# Altium PCB WORKS_PCB.PcbDoc
Units mil, origin at the board's own origin, x right, y up, seen from the top; angles counter-clockwise.
Board outline 2500.62 x 3300.62 mil, 2 copper layers (Top Layer, Bottom Layer); 36 components, 43 nets, 166 pads, 4 vias.
Unrouted connection lines stored in the file: 69.
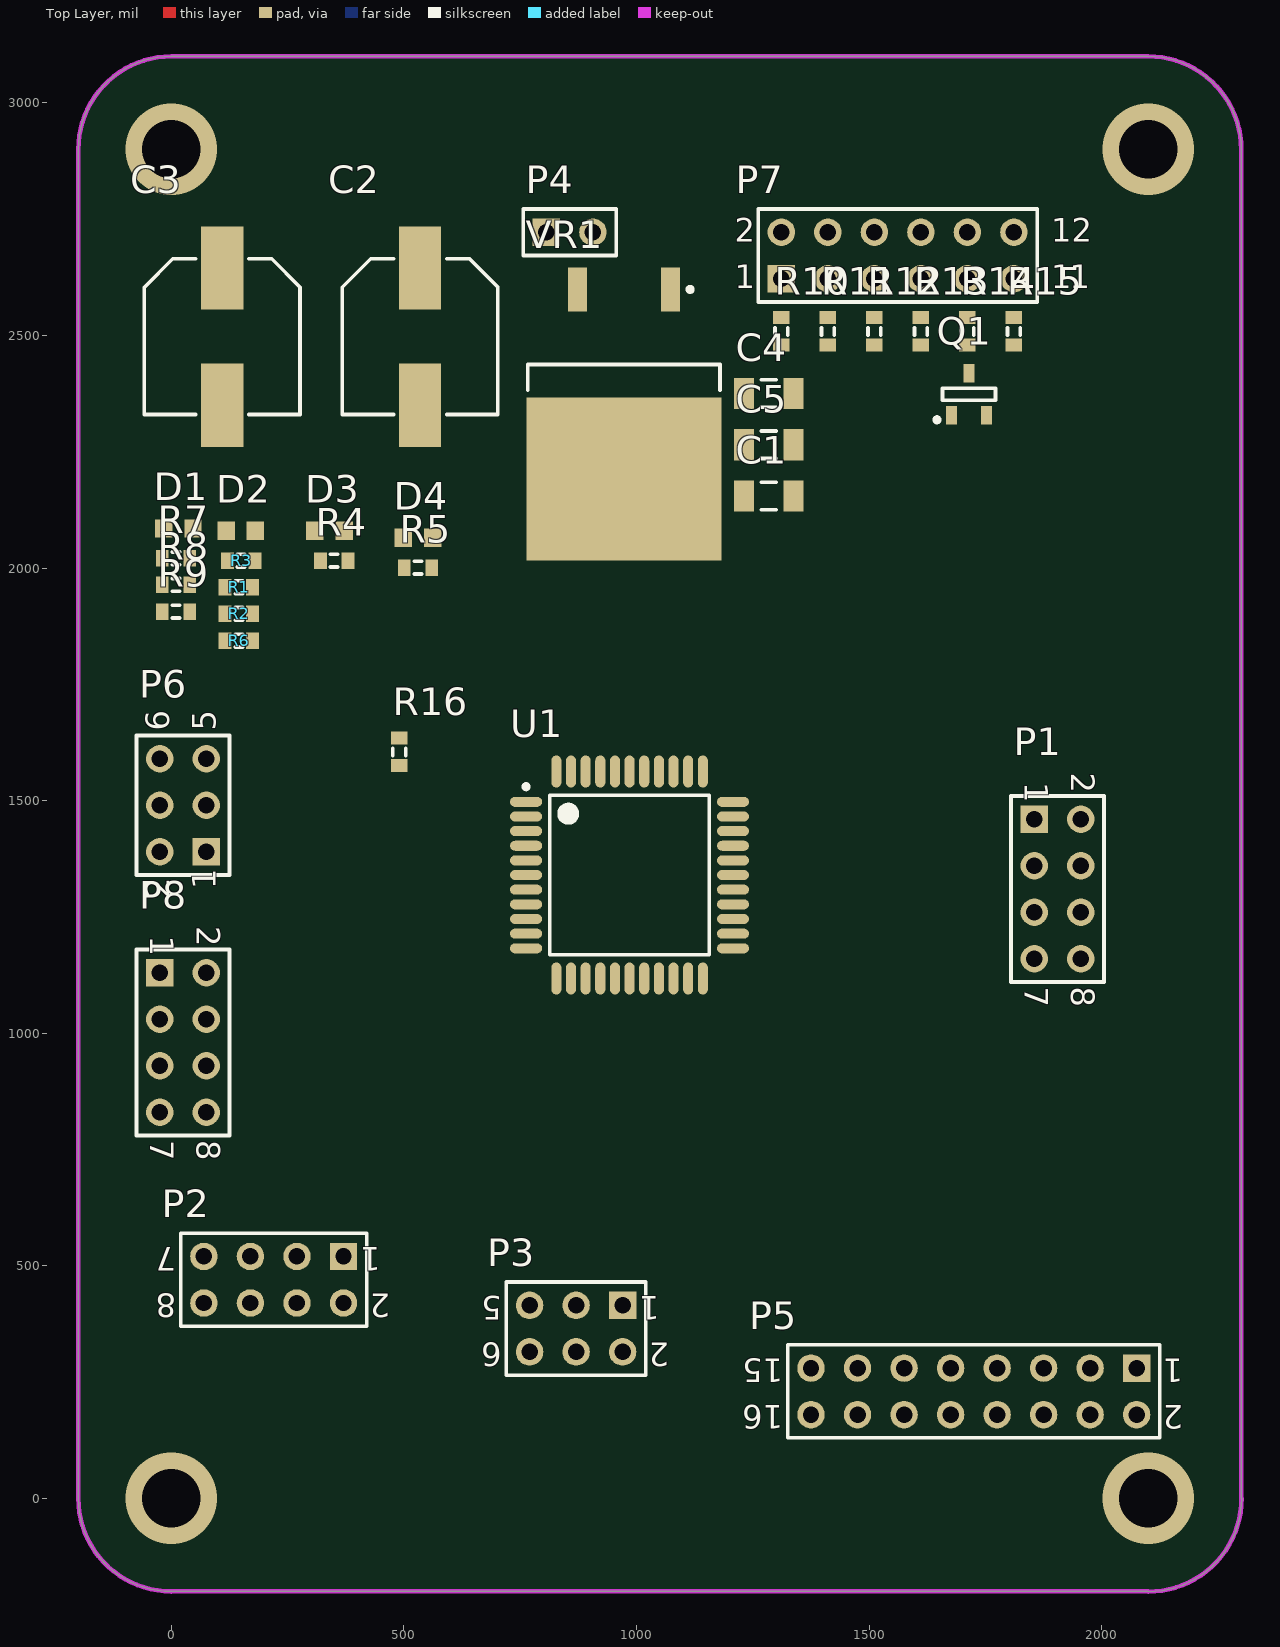
[diagram p0: Top Layer view]
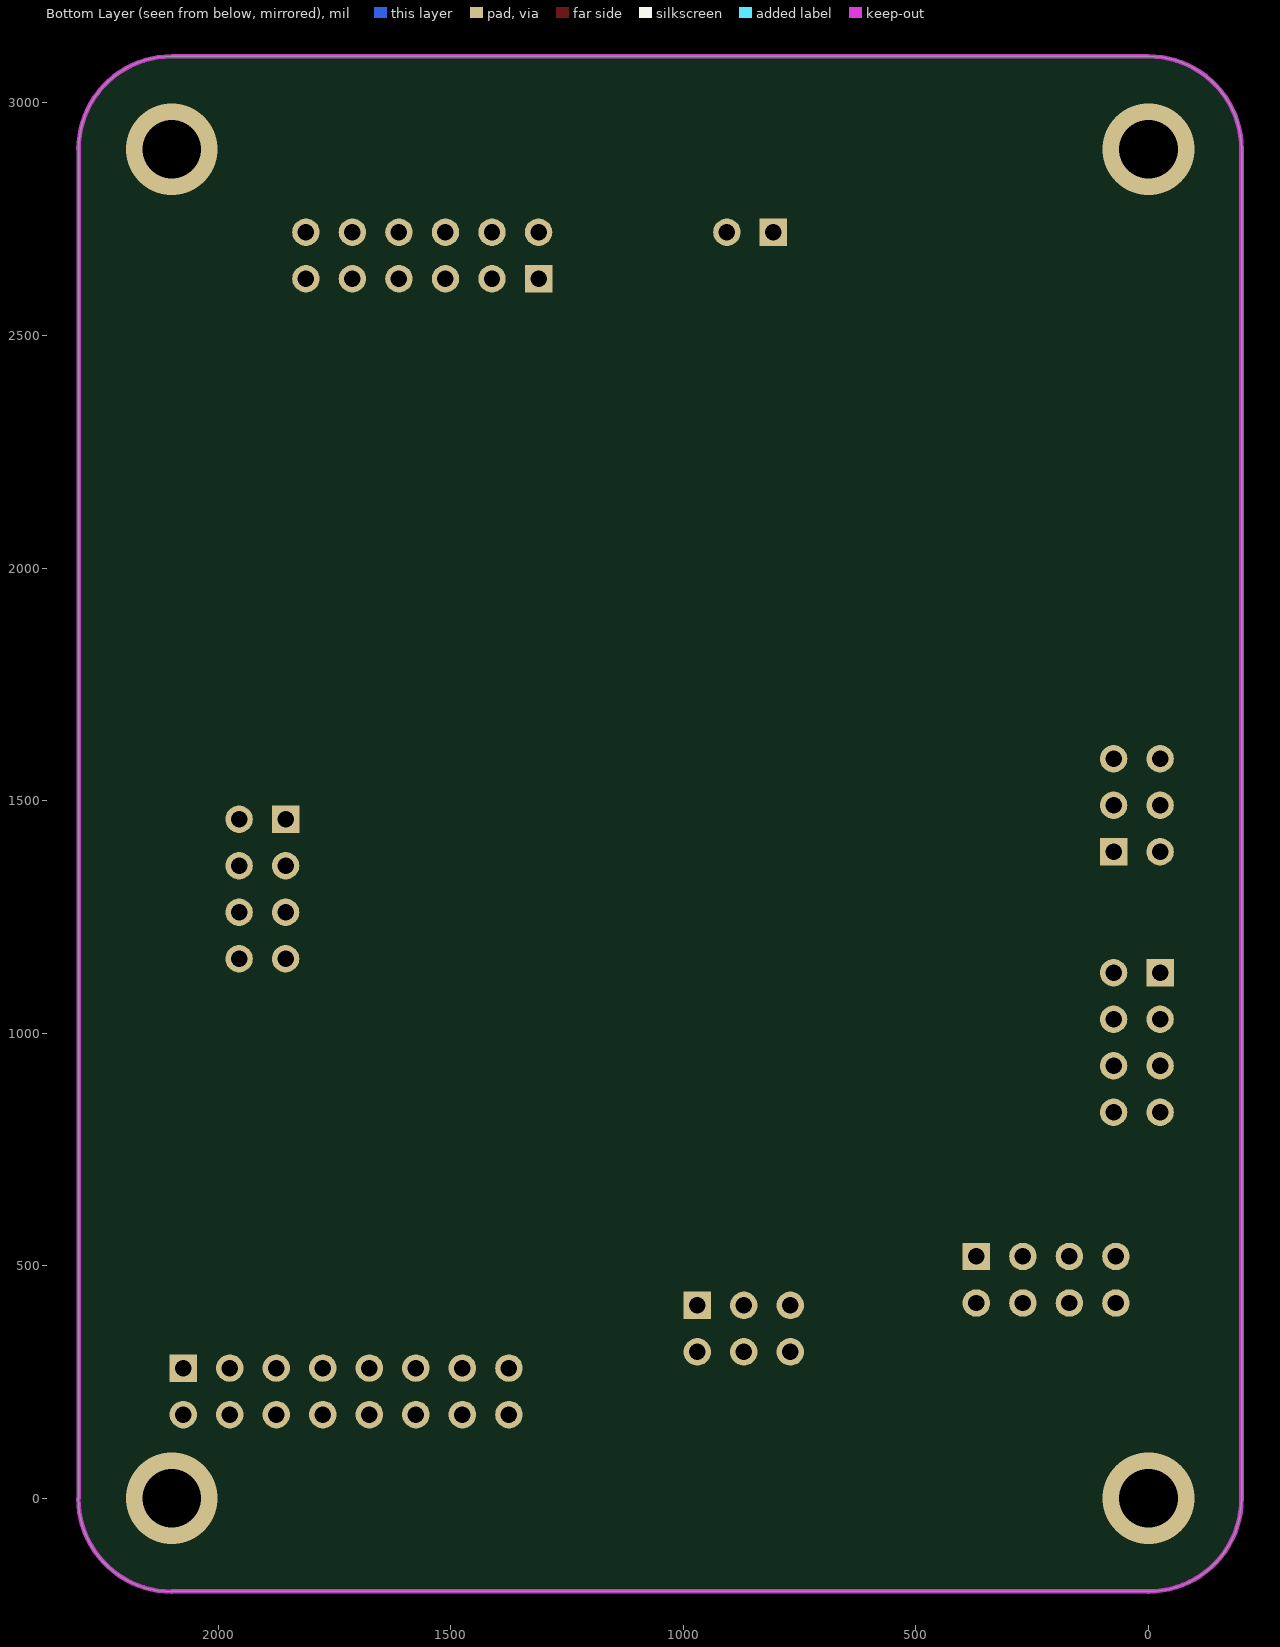
[diagram p1: Bottom Layer view, seen from below]

## Layer stack, top to bottom
Top Solder: solder mask 0.4, Solder Resist, Dk 3.5
Top Layer: signal copper 1.4
Dielectric 1: dielectric 12.6, FR-4, Dk 4.8
Bottom Layer: signal copper 1.4
Bottom Solder: solder mask 0.4, Solder Resist, Dk 3.5

## Board outline
-200,0 -200,2900 -200.06,2900 cw(c0,2900) 0,3100.06 0,3100 2100,3100 2100,3100.06 cw(c2100,2900) 2300.06,2900 2300,2900 2300,0 2300.56,0 cw(c2100,0) 2100,-200.56 2100,-200 0,-200 0,-200.06 cw(c0,0)

## Design rules (kind name [scope] priority, off if disabled: settings)
Clearance [All] p1: gap=10
PolygonConnect [All] p1: connectstyle=Relief reliefconductorwidth=10 reliefentries=4 polygonreliefangle="90 Angle" airgapwidth=10
RoomDefinition METR4810_Schematic [InComponentClass('METR4810_Schematic')] p1: confinementstyle=ConfineIn formatcopy=TRUE lockcomponents=FALSE outline 11025,-140 12160,-140 12160,335 11025,335
RoutingVias [All] p1: holewidth=28 width=50 viastyle="Through Hole" minholewidth=28 minwidth=50 maxholewidth=28 maxwidth=50
SolderMaskExpansion [All] p1: expansion=4
Width [All] p1: maxlimit=10 minlimit=10 preferedwidth=10
30 further rules are at their usual default settings.

## Components (designator, comment, footprint, x,y, rotation, side; value= is the part's Value field where it differs from the comment)
C1 "Cap Semi" C1206 1283.97,2155 r0 top
C2 "Cap Pol2" CAPAE9983X105M 534.62,2497.36 r270 top
C3 "Cap Pol2" CAPAE9983X105M 109.25,2497.36 r270 top
C4 "Cap Semi" C1206 1283.97,2375 r0 top
C5 "Cap Semi" C1206 1283.97,2265 r0 top
D1 "LED1" L0603 15,2085 r0 top
D2 "LED1" L0603 149.03,2080 r0 top
D3 "LED1" L0603 340,2080 r0 top
D4 "LED1" L0603 530,2065 r0 top
P1 "Header 4X2" HDR2X4 1855,1460 r270 top
P2 "Header 4X2" HDR2X4 370,520 r180 top
P3 "Header 3X2" HDR2X3 970,415 r180 top
P4 "Header 2" HDR1X2 806.24,2721.97 r0 top
P5 "l293D" HDR2X8 2075,280 r180 top
P6 "Header 3X2" HDR2X3 75,1390 r90 top
P7 "Header 6X2" HDR2X6 1311.26,2621.97 r0 top
P8 "Header 4X2" HDR2X4 -25,1130 r270 top
Q1 "MOSFET-P" SOT23-3 1714.7,2373.8 r90 top
R1 "Res3" J1-0603 145,1958.6 r180 top
R2 "Res3" J1-0603 145,1901.35 r0 top
R3 "Res3" J1-0603 150,2015.86 r0 top
R4 "Res3" J1-0603 350,2015.86 r0 top
R5 "Res3" J1-0603 530,2000.86 r0 top
R6 "Res3" J1-0603 145,1844.09 r180 top
R7 "Res3" J1-0603 10,2020.86 r180 top
R8 "Res3" J1-0603 10,1963.6 r0 top
R9 "Res3" J1-0603 10,1906.35 r180 top
R10 "Res3" J1-0603 1311.26,2508.81 r270 top
R11 "Res3" J1-0603 1411.26,2508.81 r270 top
R12 "Res3" J1-0603 1511.26,2508.81 r270 top
R13 "Res3" J1-0603 1611.26,2508.81 r270 top
R14 "Res3" J1-0603 1711.26,2508.81 r270 top
R15 "Res3" J1-0603 1811.26,2508.81 r270 top
R16 "Res3" J1-0603 490,1605 r270 top
U1 "ATmega324PA-AU" 44A_N 985,1340 r0 top
VR1 "Volt Reg" D2PAK_N 972.78,2331.25 r270 top

## Footprints (in the part's own frame and the unit in brackets; to place one, negate y for a bottom-side part, rotate by r counter-clockwise, add the part's x,y. Pads: shape width x height; smd on the part's side, far side on the other; paste and mask are expansions set on the pad)
44A_N [mm] "Thin QFP, 44-Leads, Body 10x10mm, Pitch 0.8mm, IPC Medium Density"
  oval 1.75x0.55 smd: 1(-5.65,4) 2(-5.65,3.2) 3(-5.65,2.4) 4(-5.65,1.6) 5(-5.65,0.8) 6(-5.65,0) 7(-5.65,-0.8) 8(-5.65,-1.6) 9(-5.65,-2.4) 10(-5.65,-3.2) 11(-5.65,-4) 23(5.65,-4) 24(5.65,-3.2) 25(5.65,-2.4) 26(5.65,-1.6) 27(5.65,-0.8) 28(5.65,0) 29(5.65,0.8) 30(5.65,1.6) 31(5.65,2.4) 32(5.65,3.2) 33(5.65,4)
  oval 0.55x1.75 smd: 12(-4,-5.65) 13(-3.2,-5.65) 14(-2.4,-5.65) 15(-1.6,-5.65) 16(-0.8,-5.65) 17(0,-5.65) 18(0.8,-5.65) 19(1.6,-5.65) 20(2.4,-5.65) 21(3.2,-5.65) 22(4,-5.65) 34(4,5.65) 35(3.2,5.65) 36(2.4,5.65) 37(1.6,5.65) 38(0.8,5.65) 39(0,5.65) 40(-0.8,5.65) 41(-1.6,5.65) 42(-2.4,5.65) 43(-3.2,5.65) 44(-4,5.65)
  silkscreen extent -5.77,-4.35 4.35,4.95, body extent -5,-5 5,5, height 1.2
C1206 [mm] "Chip Capacitor, Body 3.2x1.6mm, IPC High Density"
  rect 1.1x1.7 smd: 1(-1.35,0) 2(1.35,0)
  silkscreen extent -0.4,-0.75 0.4,0.75, body extent -1.7,-0.9 1.7,0.9, height 1.3
CAPAE9983X105M [mm] "Aluminum Electrolytic Capacitor, Body 8.30x8.30x10.50mm, IPC Low Density"
  rect 4.55x2.3 smd: 1(-3.75,0) 2(3.75,0)
  silkscreen extent -4.25,-4.25 4.25,4.25, body extent -4.25,-4.25 4.25,4.25, height 10.5
D2PAK_N [mm] "D2-PAK, 4-Leads, Body 8.8x10.4mm, Pitch 2.54mm, Lead Span 15.1mm, IPC Medium Density"
  rect 2.4x1.05 smd: 1(-6.8,2.54) 3(-6.8,-2.54)
  rect 8.9x10.65 smd: 2(3.55,0)
  silkscreen extent -6.92,-5.25 -1.3,5.25, body extent -2.7,-5.28 6.3,5.28, height 4.69
HDR1X2 [mm] "Connector; Header; 2 Position"
  rect 1.5x1.5 hole 0.9: 1(0,0)
  round 1.5 hole 0.9: 2(2.54,0)
  silkscreen extent -1.27,-1.27 3.81,1.27
HDR2X3 [mm] "Connector; Header; 3x2 Position"
  rect 1.5x1.5 hole 0.9: 1(0,0)
  round 1.5 hole 0.9: 2(0,2.54) 3(2.54,0) 4(2.54,2.54) 5(5.08,0) 6(5.08,2.54)
  silkscreen extent -1.27,-1.27 6.35,3.81
HDR2X4 [mm] "Connector; Header; 4x2 Position"
  rect 1.5x1.5 hole 0.9: 1(0,0)
  round 1.5 hole 0.9: 2(0,2.54) 3(2.54,0) 4(2.54,2.54) 5(5.08,0) 6(5.08,2.54) 7(7.62,0) 8(7.62,2.54)
  silkscreen extent -1.27,-1.27 8.89,3.81
HDR2X6 [mm] "Connector; Header; 6x2 Position"
  rect 1.5x1.5 hole 0.9: 1(0,0)
  round 1.5 hole 0.9: 2(0,2.54) 3(2.54,0) 4(2.54,2.54) 5(5.08,0) 6(5.08,2.54) 7(7.62,0) 8(7.62,2.54) 9(10.16,0) 10(10.16,2.54) 11(12.7,0) 12(12.7,2.54)
  silkscreen extent -1.27,-1.27 13.97,3.81
HDR2X8 [mm] "Connector; Header; 8x2 Position"
  rect 1.5x1.5 hole 0.9: 1(0,0)
  round 1.5 hole 0.9: 2(0,2.54) 3(2.54,0) 4(2.54,2.54) 5(5.08,0) 6(5.08,2.54) 7(7.62,0) 8(7.62,2.54) 9(10.16,0) 10(10.16,2.54) 11(12.7,0) 12(12.7,2.54) 13(15.24,0) 14(15.24,2.54) 15(17.78,0) 16(17.78,2.54)
  silkscreen extent -1.27,-1.27 19.05,3.81
J1-0603 [mm] "Chip Resistor, Body 1.6x0.8mm, IPC High Density"
  rect 0.7x0.9 smd: 1(-0.75,0) 2(0.75,0)
  silkscreen extent -0.2,-0.35 0.2,0.35, body extent -0.85,-0.48 0.85,0.48, height 0.9
L0603 [mm]
  rect 0.95x1 smd: 1(-0.8,0) 2(0.8,0)
SOT23-3 [mm]
  rect 1x0.6 smd: 1(-1.15,0.95) 2(-1.15,-0.95) 3(1.15,0)
  silkscreen extent -1.52,-1.45 0.33,1.87

## Part data
C1 C4 C5: "Capacitor (Semiconductor SIM Model)"
C2 C3: "Polarized Capacitor (Axial)"
D1 D2 D3 D4: "Typical RED GaAs LED"
P1 P2 P8: "Header, 4-Pin, Dual row"
P3 P6: "Header, 3-Pin, Dual row"
P4: "Header, 2-Pin"
P5: library part "Header 8X2", "Header, 8-Pin, Dual row"
P7: "Header, 6-Pin, Dual row"
Q1: "P-Channel MOSFET"
R1 R2 R3 R4 R5 R6 R7 R8 R9 R10 R11 R12 R13 R14 R15 R16: "Resistor"
U1: "8-bit AVR Microcontroller, 32KB Flash, 1KB EEPROM, 2KB SRAM, 44-pin TQFP, Industrial Grade (-40°C to 85°C)"
VR1: "Voltage Regulator"

## Via types
v1: diameter 196.85, hole 125.98, Top Layer to Bottom Layer, 4 vias

## Nets (pads, with @x,y where several pads share a name; then routed paths per layer and width w, separated by ;. In a path a pad name is that pad's centre, name@x,y a point inside that pad or via, vN(x,y) a via of type N, cw(c..) or ccw(c..) an arc to the next point about the centre after c; other vN are vias at no path point)
BAT: C2.1 C3.1 C5.2 P1.4 P2.1 P4.1 P5.15 P8.4 VR1.1
"DC 1 ENABLE": P2.5 U1.12
"DC 2 ENABLE": P2.6 U1.11
"FOR DIR 1": P5.3 U1.19
"FOR DIR 2": P5.4 U1.21
GND: C1.1 C2.2 C3.2 C4.1 C5.1 D1.2 D2.2 D3.2 D4.2 P1.8 P2.8 P3.5 P3.6 P4.2 P5.7 P5.8 P5.9 P5.10 P6.6 P7.2 P7.4 P7.6 P7.8 P7.10 P7.12 P8.3 P8.6 R6.2 R9.2 U1.6 U1.18 U1.28 U1.39 VR1.2
HI-BEAM: Q1.2 U1.34
MISO: P6.1 U1.2
MOSI: P6.4 U1.1
"MOTOR A 1": P5.5
"MOTOR A 2": P5.11
"MOTOR B 1": P5.6
"MOTOR B 2": P5.12
NetD2_1: D2.1 R3.1
NetD3_1: D3.1 R4.1
NetD4_1: D4.1 R5.1
NetQ1_3: Q1.3 R13.2 R14.2 R15.2
NetR2_2: R2.2 R6.1
NetR8_2: R8.2 R9.1
POWER: D1.1 R7.2 R8.1
"PWM DC 1": P2.3 U1.14
"PWM DC 2": P2.4 U1.13
"PWM SV 1": P3.2 P5.1 U1.15
"PWM SV 2": P3.1 P5.16 U1.16
RESET: P6.5 R16.1 U1.4
"REV DIR 1": P5.13 U1.20
"REV DIR 2": P5.14 U1.22
RXD: P8.7 R4.2 U1.9
S1-IN1: P1.1 U1.26
S1-IN2: P1.3 U1.25
S1-IN3: P1.5 U1.24
S1-IN4: P1.7 U1.23
SCK: P6.3 U1.3
STATUS: R5.2 U1.33
TORCH1: P7.1 R10.1
TORCH2: P7.3 R11.1
TORCH3: P7.5 R12.1
TORCH4: P7.7 R13.1
TORCH5: P7.9 R14.1
TORCH6: P7.11 R15.1
TXD: R1.1 R3.2 U1.10
TXD_3.3V: P8.5 R1.2 R2.1
VCC: C1.2 C4.2 P1.2 P2.2 P3.3 P3.4 P5.2 P6.2 P8.1 P8.2 Q1.1 R7.1 R10.2 R11.2 R12.2 R16.2 U1.5 U1.17 U1.27 U1.29 U1.38 VR1.3
pads on no net: P1.6 P2.7 P8.8 U1.7 U1.8 U1.30 U1.31 U1.32 U1.35 U1.36 U1.37 U1.40 U1.41 U1.42 U1.43 U1.44
copper on no net:
  other v1: 0,0 2100,0 0,2900 2100,2900

## Polygon pours and split planes (outlines as drawn)
GND on Bottom Layer "NONET_L02_P000" (solid, remove dead copper, shelved, pour order 0): -200,0 -200,2900 -200.06,2900 cw(c0,2900) 0,3100.06 0,3100 2100,3100 2100,3100.06 cw(c2100,2900) 2300.06,2900 2300,2900 2300,0 2300.56,0 cw(c2100,0) 2100,-200.56 2100,-200 0,-200 0,-200.06 cw(c0.03,-0.03)
VCC on Top Layer "NONET_L01_P001" (solid, remove dead copper, shelved, pour order 1): -200,0 -200,2900 -200.06,2900 cw(c0,2900) 0,3100.06 0,3100 2100,3100 2100,3100.06 cw(c2100,2900) 2300.06,2900 2300,2900 2300,0 2300.56,0 cw(c2100,0) 2100,-200.56 2100,-200 0,-200 0,-200.06 cw(c0.03,-0.03)

## Keep-outs
Keep-Out Layer:
  lines w10: -200.06,0 ccw(c0,0) 0,-200.06 ; -200.06,2900 cw(c0,2900) 0,3100.06 ; -200,0 -200,2900 ; 0,-200 2100,-200 ; 0,3100 2100,3100 ; 2100,-200.56 ccw(c2100,0) 2300.56,0 ; 2100,3100.06 cw(c2100,2900) 2300.06,2900 ; 2300,0 2300,2900

## Text inside footprints (layer, text, board x,y; h text height)
P1: Top Overlay "2" at 1935,1560 h50 r270; Top Overlay "1" at 1835,1540 h50 r270; Top Overlay "7" at 1835,1100 h50 r270; Top Overlay "8" at 1935,1100 h50 r270
P2: Top Overlay "2" at 470,440 h50 r180; Top Overlay "1" at 450,540 h50 r180; Top Overlay "7" at 10,540 h50 r180; Top Overlay "8" at 10,440 h50 r180
P3: Top Overlay "6" at 710,335 h50 r180; Top Overlay "5" at 710,435 h50 r180; Top Overlay "2" at 1070,335 h50 r180; Top Overlay "1" at 1050,435 h50 r180
P5: Top Overlay "2" at 2175,200 h50 r180; Top Overlay "1" at 2175,300 h50 r180; Top Overlay "15" at 1315,300 h50 r180; Top Overlay "16" at 1315,200 h50 r180
P6: Top Overlay "6" at -5,1650 h50 r90; Top Overlay "5" at 95,1650 h50 r90; Top Overlay "2" at -5,1290 h50 r90; Top Overlay "1" at 95,1310 h50 r90
P7: Top Overlay "12" at 1891.26,2701.97 h50; Top Overlay "1" at 1931.26,2601.97 h50; Top Overlay "1" at 1891.26,2601.97 h50; Top Overlay "1" at 1211.26,2601.97 h50; Top Overlay "2" at 1211.26,2701.97 h50
P8: Top Overlay "2" at 55,1230 h50 r270; Top Overlay "1" at -45,1210 h50 r270; Top Overlay "7" at -45,770 h50 r270; Top Overlay "8" at 55,770 h50 r270